# Altium PCB led_test.PcbDoc
Units mil, origin at the board's own origin, x right, y up, seen from the top; angles counter-clockwise.
Board outline 6000 x 4000 mil, 2 copper layers (Top Layer, Bottom Layer); 51 components, 27 nets, 106 pads, 0 vias.
Unrouted connection lines stored in the file: 69.
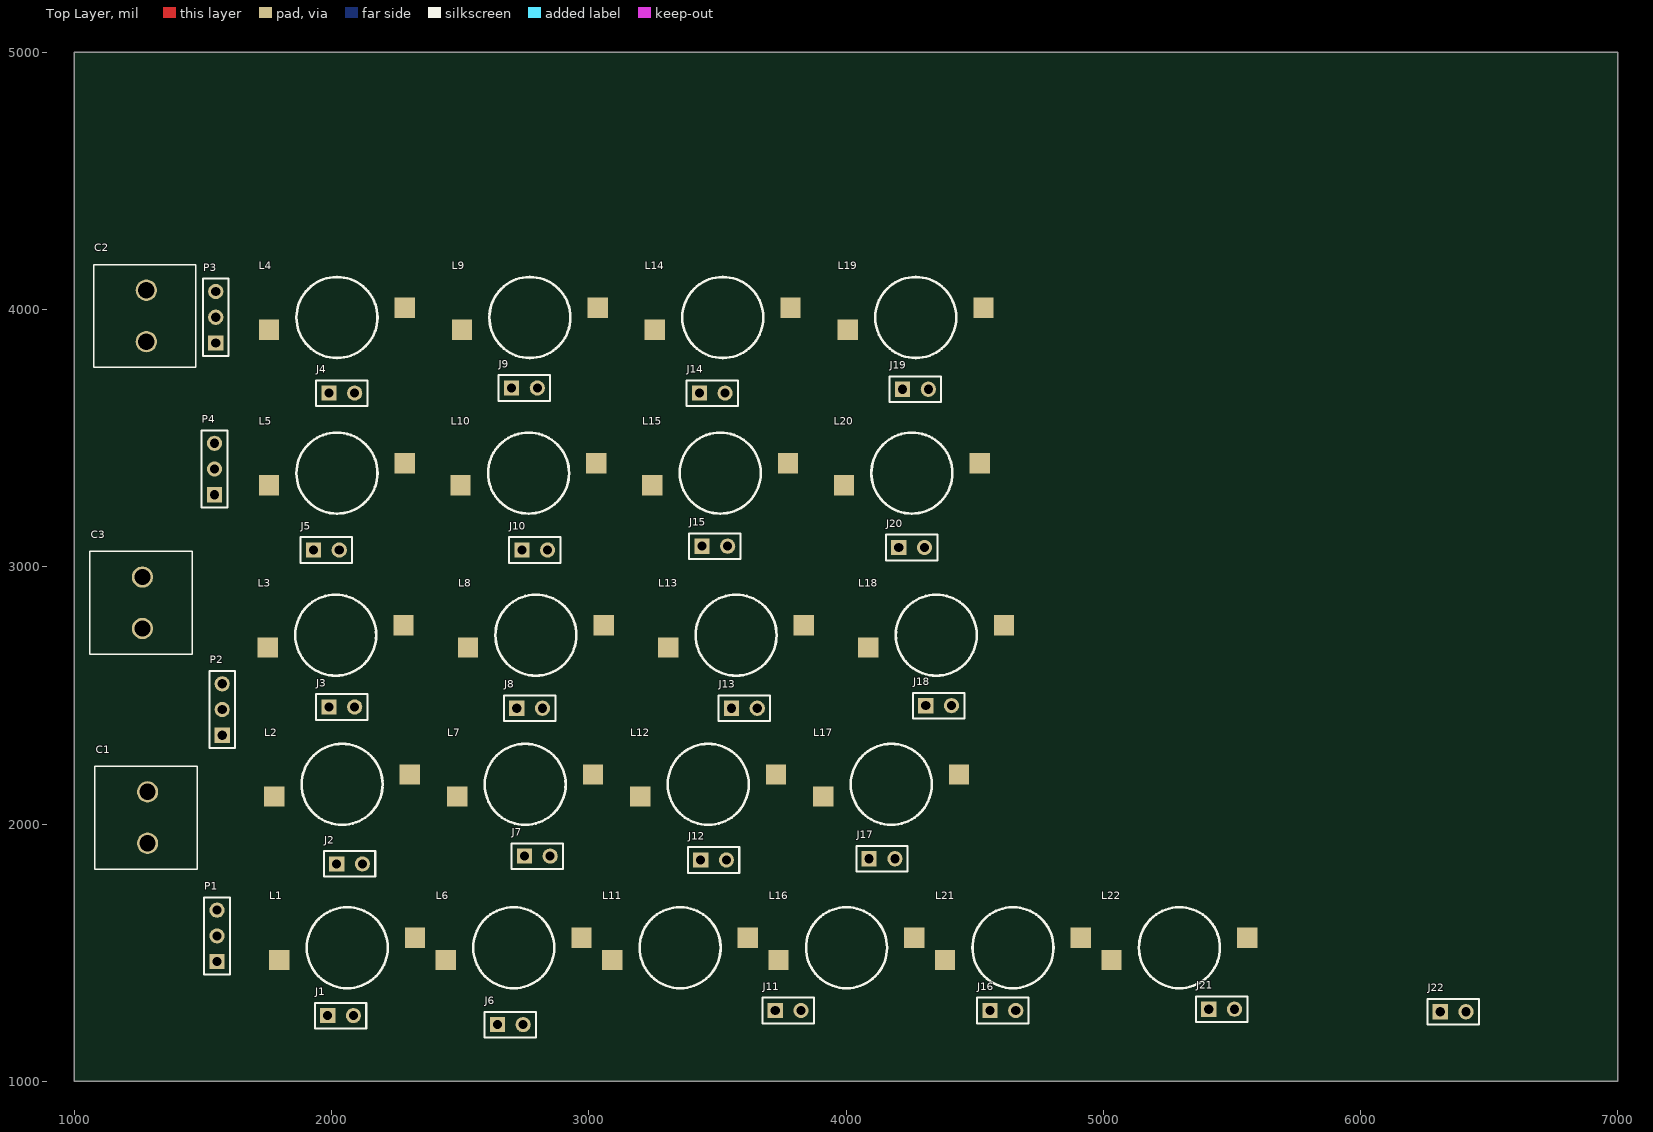
[diagram p0: Top Layer view]
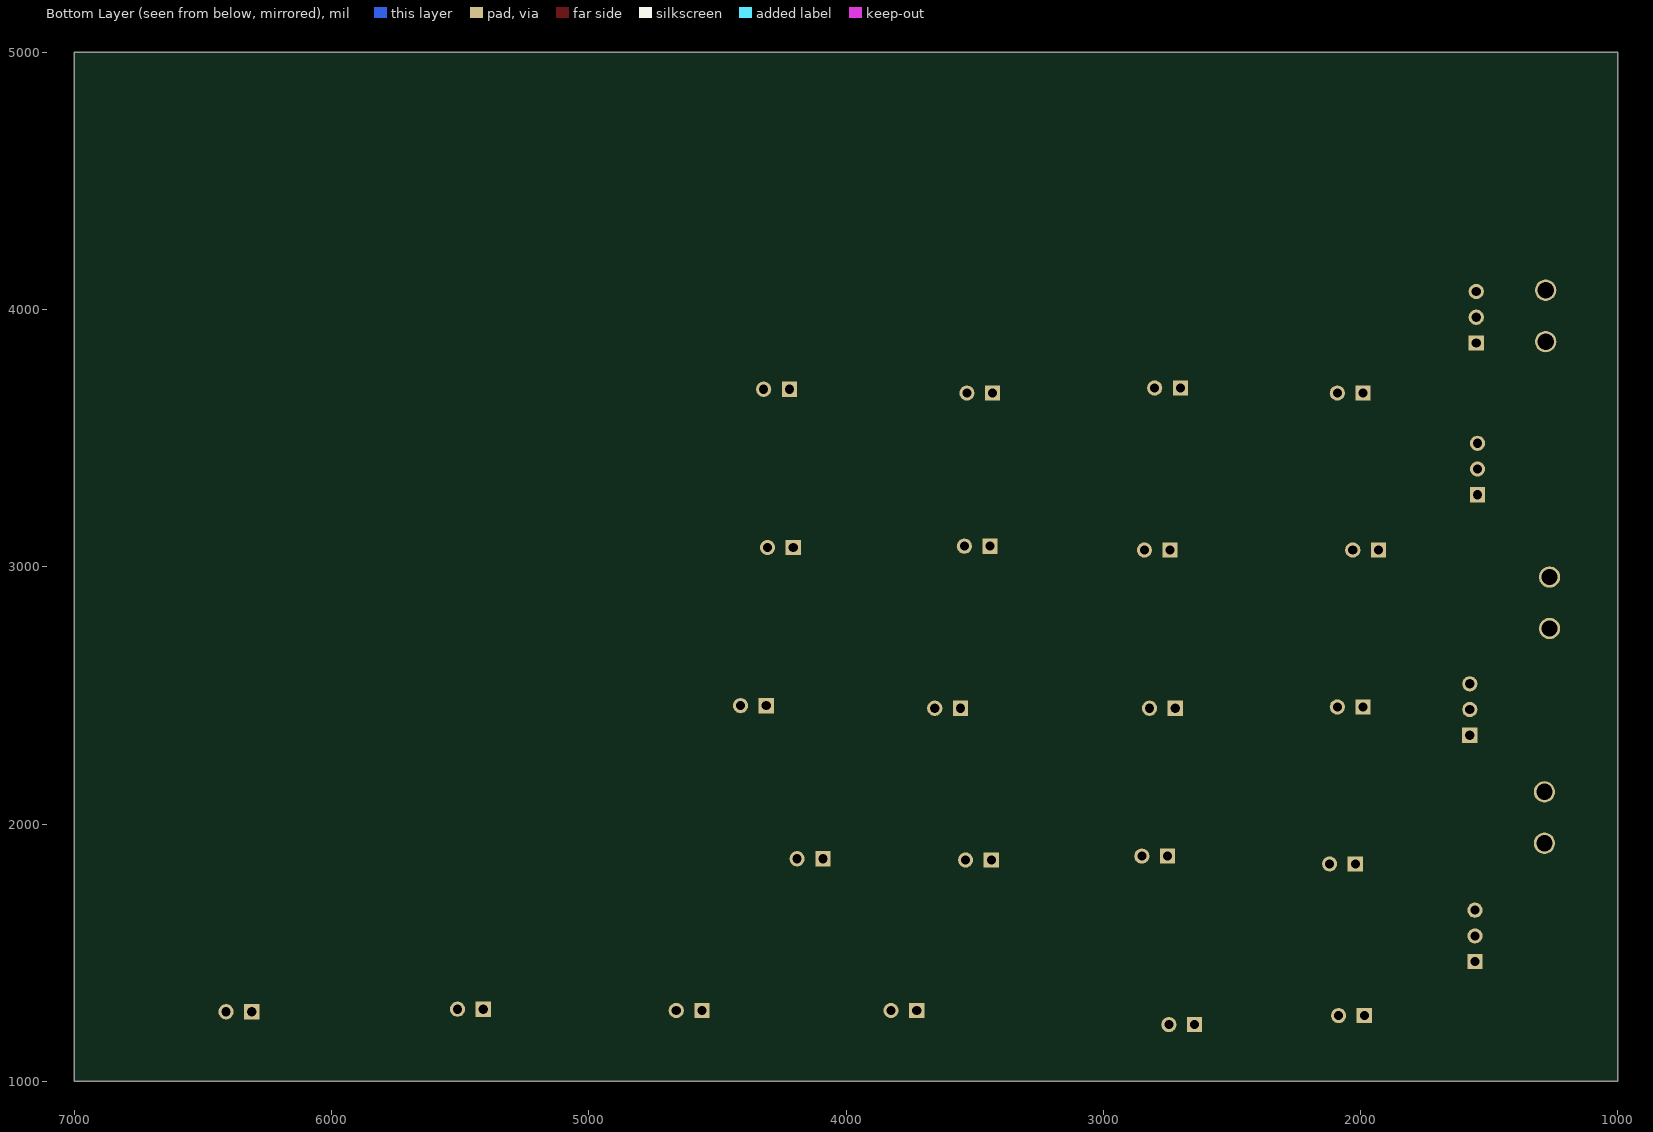
[diagram p1: Bottom Layer view, seen from below]

## Layer stack, top to bottom
Top Solder: solder mask 0.4, Solder Resist, Dk 3.5
Top Layer: signal copper 1.4
Dielectric 1: dielectric 12.6, FR-4, Dk 4.8
Bottom Layer: signal copper 1.4
Bottom Solder: solder mask 0.4, Solder Resist, Dk 3.5

## Board outline
1000,1000 7000,1000 7000,5000 1000,5000

## Design rules (kind name [scope] priority, off if disabled: settings)
Clearance [All] p1: gap=10
PolygonConnect [All] p1: connectstyle=Relief reliefconductorwidth=10 reliefentries=4 polygonreliefangle="90 Angle" airgapwidth=10
RoutingVias [All] p1: holewidth=28 width=50 viastyle="Through Hole" minholewidth=28 minwidth=50 maxholewidth=28 maxwidth=50
SolderMaskExpansion [All] p1: expansion=4
Width [All] p1: maxlimit=10 minlimit=10 preferedwidth=10
29 further rules are at their usual default settings.

## Components (designator, comment, footprint, x,y, rotation, side; value= is the part's Value field where it differs from the comment)
C1 "WE-Terminal Blocks Screw Type 691216510002" 691216510002 1285,2025 r90 top
C2 "WE-Terminal Blocks Screw Type 691216510002" 691216510002 1280,3975 r90 top
C3 "WE-Terminal Blocks Screw Type 691216510002" 691216510002 1265,2860 r90 top
J1 "Header 2" HDR1X2 1985,1255 r0 top
J2 "Header 2" HDR1X2 2020,1845 r0 top
J3 "Header 2" HDR1X2 1990,2455 r0 top
J4 "Header 2" HDR1X2 1990,3675 r0 top
J5 "Header 2" HDR1X2 1930,3065 r0 top
J6 "Header 2" HDR1X2 2645,1220 r0 top
J7 "Header 2" HDR1X2 2750,1875 r0 top
J8 "Header 2" HDR1X2 2720,2450 r0 top
J9 "Header 2" HDR1X2 2700,3695 r0 top
J10 "Header 2" HDR1X2 2740,3065 r0 top
J11 "Header 2" HDR1X2 3725,1275 r0 top
J12 "Header 2" HDR1X2 3435,1860 r0 top
J13 "Header 2" HDR1X2 3555,2450 r0 top
J14 "Header 2" HDR1X2 3430,3675 r0 top
J15 "Header 2" HDR1X2 3440,3080 r0 top
J16 "Header 2" HDR1X2 4560,1275 r0 top
J17 "Header 2" HDR1X2 4090,1865 r0 top
J18 "Header 2" HDR1X2 4310,2460 r0 top
J19 "Header 2" HDR1X2 4220,3690 r0 top
J20 "Header 2" HDR1X2 4205,3075 r0 top
J21 "Header 2" HDR1X2 5410,1280 r0 top
J22 "Header 2" HDR1X2 6310,1270 r0 top
L1 "RED" "1W LED" 2065,1525 r0 top
L2 "BLUE" "1W LED" 2045,2160 r0 top
L3 "BLUE" "1W LED" 2020,2740 r0 top
L4 "GREEN" "1W LED" 2025,3975 r0 top
L5 "WHITE" "1W LED" 2025,3370 r0 top
L6 "RED" "1W LED" 2712,1525 r0 top
L7 "BLUE" "1W LED" 2756.67,2160 r0 top
L8 "BLUE" "1W LED" 2798.33,2740 r0 top
L9 "GREEN" "1W LED" 2775,3975 r0 top
L10 "WHITE" "1W LED" 2770,3370 r0 top
L11 "RED" "1W LED" 3359,1525 r0 top
L12 "BLUE" "1W LED" 3468.33,2160 r0 top
L13 "BLUE" "1W LED" 3576.67,2740 r0 top
L14 "GREEN" "1W LED" 3525,3975 r0 top
L15 "WHITE" "1W LED" 3515,3370 r0 top
L16 "RED" "1W LED" 4006,1525 r0 top
L17 "BLUE" "1W LED" 4180,2160 r0 top
L18 "BLUE" "1W LED" 4355,2740 r0 top
L19 "GREEN" "1W LED" 4275,3975 r0 top
L20 "WHITE" "1W LED" 4260,3370 r0 top
L21 "RED" "1W LED" 4653,1525 r0 top
L22 "RED" "1W LED" 5300,1525 r0 top
P1 "Header 3" HDR1X3 1555,1465 r90 top
P2 "Header 3" HDR1X3 1575,2345 r90 top
P3 "Header 3" HDR1X3 1550,3870 r90 top
P4 "Header 3" HDR1X3 1545,3280 r90 top

## Footprints (in the part's own frame and the unit in brackets; to place one, negate y for a bottom-side part, rotate by r counter-clockwise, add the part's x,y. Pads: shape width x height; smd on the part's side, far side on the other; paste and mask are expansions set on the pad)
"1W LED" [mm]
  rect 2x2 smd: 1(-6.811,-1.359) 2(6.592,0.822)
  silkscreen extent -4.1,-4.15 3.9,3.85, body extent -7.31,-4.26 7.19,3.74, height 5.55
691216510002 [mm] "5,08mm - Modular - Horizontal wire entry - Rising cage clamp - 02p"
  round 2.1 hole 1.6: 1(-2.54,0) 2(2.54,0)
  silkscreen extent -5.08,-4.9 5.08,5.2, body extent -5.08,-4.9 5.68,5.2, height 13.81
HDR1X2 [mm] "Connector; Header; 2 Position"
  rect 1.5x1.5 hole 0.9: 1(0,0)
  round 1.5 hole 0.9: 2(2.54,0)
  silkscreen extent -1.27,-1.27 3.81,1.27
HDR1X3 [mm] "Connector; Header; 3 Position"
  rect 1.5x1.5 hole 0.9: 1(0,0)
  round 1.5 hole 0.9: 2(2.54,0) 3(5.08,0)
  silkscreen extent -1.27,-1.27 6.35,1.27

## Part data
C1 C2 C3: "WR-TBL Terminal block - serie 2165 - 5.08 mm"
J1 J2 J3 J4 J5 J6 J7 J8 J9 J10 J11 J12 J13 J14 J15 J16 J17 J18 J19 J20 J21 J22: "Header, 2-Pin"
L1 L2 L3 L4 L5 L6 L7 L8 L9 L10 L11 L12 L13 L14 L15 L16 L17 L18 L19 L20 L21 L22: library part LED2
P1 P2 P3 P4: "Header, 3-Pin"

## Nets (pads, with @x,y where several pads share a name; then routed paths per layer and width w, separated by ;. In a path a pad name is that pad's centre, name@x,y a point inside that pad or via, vN(x,y) a via of type N, cw(c..) or ccw(c..) an arc to the next point about the centre after c; other vN are vias at no path point)
B: C3.1 P2.1
G: C2.2 P3.1
GND: C1.2 J17.2 J18.2 J19.2 J20.2 J22.2 L17.2 L18.2 L19.2 L20.2 L22.2
NetJ1_1: J1.1 L1.1 P1.2
NetJ1_2: J1.2 J6.1 L1.2 L6.1
NetJ2_1: J2.1 J3.1 L2.1 L3.1 P2.2
NetJ2_2: J2.2 J7.1 L2.2 L7.1
NetJ3_2: J3.2 J8.1 L3.2 L8.1
NetJ4_1: J4.1 L4.1 P3.2
NetJ4_2: J4.2 J9.1 L4.2 L9.1
NetJ5_1: J5.1 L5.1 P4.2
NetJ5_2: J5.2 J10.1 L5.2 L10.1
NetJ6_2: J6.2 J11.1 L6.2 L11.1
NetJ7_2: J7.2 J12.1 L7.2 L12.1
NetJ8_2: J8.2 J13.1 L8.2 L13.1
NetJ9_2: J9.2 J14.1 L9.2 L14.1
NetJ10_2: J10.2 J15.1 L10.2 L15.1
NetJ11_2: J11.2 J16.1 L11.2 L16.1
NetJ12_2: J12.2 J17.1 L12.2 L17.1
NetJ13_2: J13.2 J18.1 L13.2 L18.1
NetJ14_2: J14.2 J19.1 L14.2 L19.1
NetJ15_2: J15.2 J20.1 L15.2 L20.1
NetJ16_2: J16.2 J21.1 L16.2 L21.1
NetJ21_2: J21.2 J22.1 L21.2 L22.1
R: C2.1 P1.1
VCC: C1.1 P1.3 P2.3 P3.3 P4.3
W: C3.2 P4.1